# EAGLE board Skripsi Final Single (EAGLE 6.5.0)
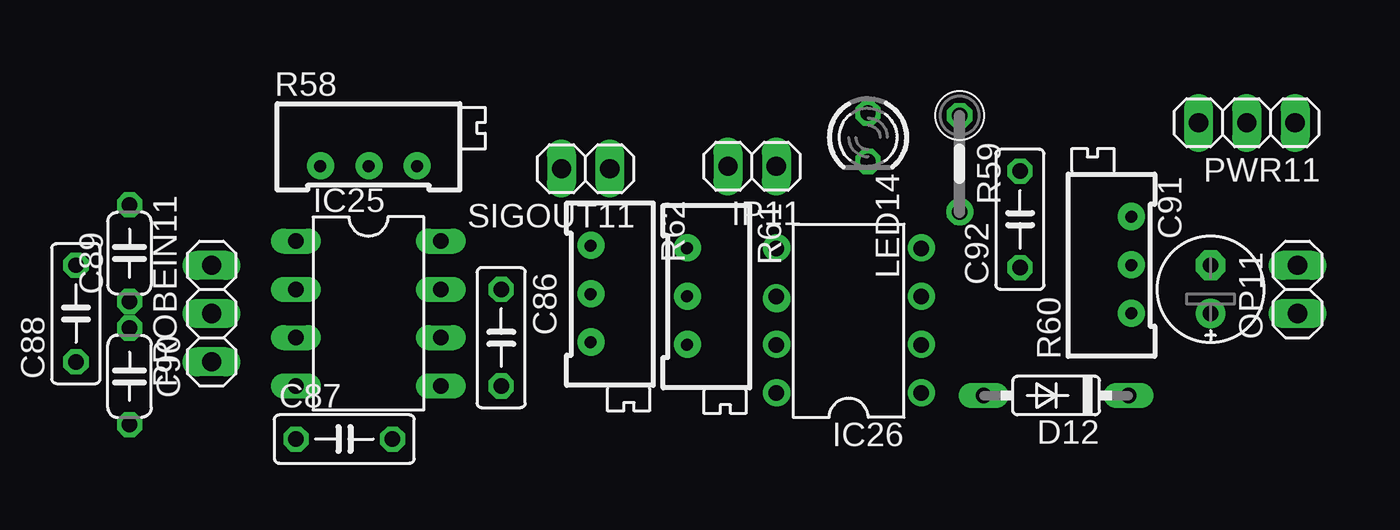
[diagram p0: board, top side]
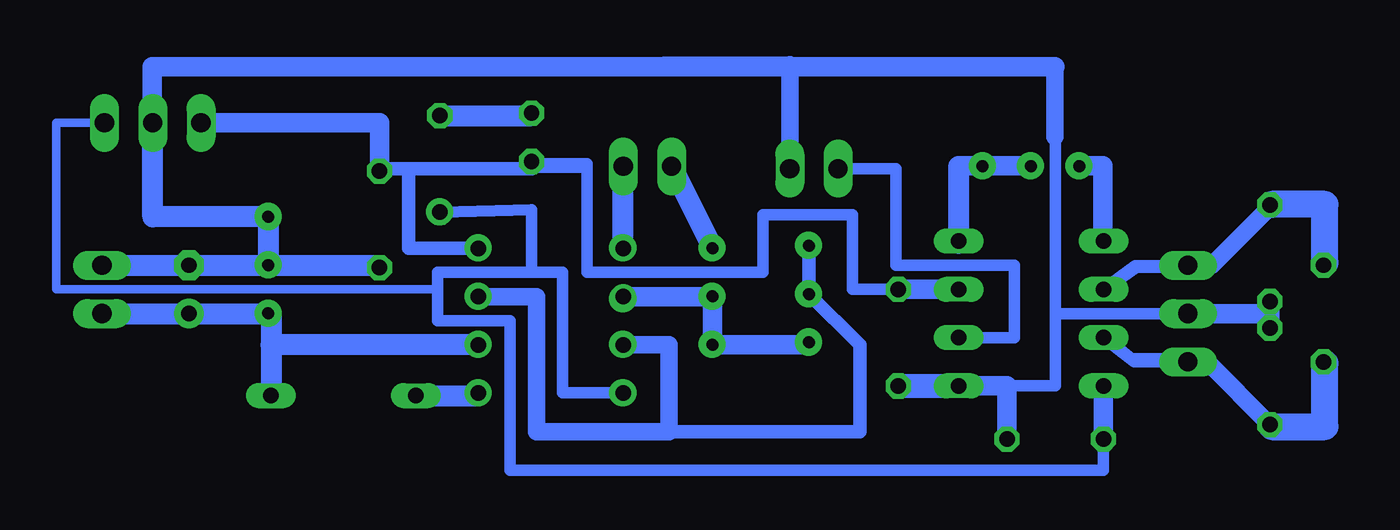
[diagram p1: board, bottom side, seen from below]

No outline drawn. Coordinates in mm, seen from the top.
Copper layers (1*16): Top 0.035mm / dielectric 1.5mm / Bottom 0.035mm
Design rules "default": minimum track width 10mil, minimum drill 24mil, track to track 8mil, track to pad 8mil, pad to pad 8mil, via to via 8mil, smd to smd 8mil, copper to edge 40mil, drill to drill 8mil, minimum pad ring 10mil, minimum via ring 8mil, stop-mask expansion 4mil, vias tented up to drill 0mil, thermal gap 10mil

## Footprints (pad centres in the part's own frame; a part is rotated, then mirrored left to right if it is on the bottom)
C050-025X075 = drill 0.813 octagon: 1 -2.54,0; 2 2.54,0
C050-024X044 = drill 0.813 octagon: 1 -2.54,0; 2 2.54,0
E2,5-6E = drill 0.813 pad 1.575: + -1.27,0 | drill 0.813 pad 1.575 octagon: - 1.27,0
DO35-7 = drill 0.813 long: A 3.81,0; C -3.81,0
DIL08 = drill 0.813 long: 1 -3.81,-3.81; 2 -1.27,-3.81; 3 1.27,-3.81; 4 3.81,-3.81; 5 3.81,3.81; 6 1.27,3.81; 7 -1.27,3.81; 8 -3.81,3.81
DIL08' = drill 0.813 pad 1.27: 1 -3.81,-3.81; 2 -1.27,-3.81; 3 1.27,-3.81; 4 3.81,-3.81; 5 3.81,3.81; 6 1.27,3.81; 7 -1.27,3.81; 8 -3.81,3.81
1X02 = drill 1.016 long: 1 -1.27,0; 2 1.27,0
LED3MM = drill 0.813 octagon: A -1.27,0; K 1.27,0
1X03 = drill 1.016 long: 1 -2.54,0; 2 0,0; 3 2.54,0
RTRIM64X = drill 0.61: 1 1.27,-2.54; 2 1.27,0; 3 1.27,2.54
0207/5V = drill 0.813 octagon: 1 -2.54,0; 2 2.54,0

## Placement (x,y rotation side)
C86  100n  [C050-025X075]  26.26,11.53 270 top
C87  100n  [C050-025X075]  18.01,6.2 0 top
C88  10n  [C050-025X075]  3.89,12.8 90 top
C89  1n  [C050-024X044]  6.71,15.98 90 top
C90  1n  [C050-024X044]  6.71,9.5 270 top
C91  [E2,5-6E]  63.6,14.07 90 top
C92  [C050-025X075]  53.57,17.75 90 top
D12  1N4148DO35-7  [DO35-7]  55.47,8.48 180 top
IC25  AD797N  [DIL08]  19.28,12.8 270 top
IC26  TL082P  [DIL08']  44.55,12.42 90 top
IP11  [1X02]  39.47,20.55 180 top
LED14  [LED3MM]  45.57,22.07 270 top
OP11  [1X02]  68.17,14.07 90 top
PROBEIN11  [1X03]  11.02,12.8 90 top
PWR11  [1X03]  65.51,22.83 180 top
R58  200R  [RTRIM64X]  19.28,21.82 270 top
R59  75k  [0207/5V]  50.39,20.68 270 top
R60  [RTRIM64X]  58.14,15.34 0 top
R61  [RTRIM64X]  37.31,13.69 180 top
R62  [RTRIM64X]  32.23,13.82 180 top
SIGOUT11  [1X02]  30.71,20.42 180 top

## Library data of the parts
C86-C92 R58-R62 = rcl
D12 = diode
IC25 = analog-devices; MF: ALTERA CORPORATION; MPN: AD797ANZ; OC_FARNELL: 9603778; OC_NEWARK: 59K6088
IC26 = linear
IP11 OP11 PROBEIN11 PWR11 SIGOUT11 = pinhead
LED14 = led

## Nets
N$177: IC25.1 R58.1
N$178: C88.1 C90.2 IC25.3 PROBEIN11.1
N$179: C88.2 C89.2 IC25.2 PROBEIN11.3
N$180: LED14.A R59.1
N$181: D12.A IC26.1
N$182: C86.1 C92.2 IC25.7 IC26.4 LED14.K PWR11.3
N$183: C87.1 IC25.4 IC26.8 PWR11.1 R59.2
N$184: C86.2 C87.2 C89.1 C90.1 C91.- C92.1 IC25.5 OP11.2 PROBEIN11.2 PWR11.2 R60.2 R60.3 SIGOUT11.1
N$185: C91.+ D12.C IC26.2 OP11.1 R60.1
N$186: IC25.6 SIGOUT11.2
N$187: IC26.3 IC26.7 R62.1 R62.2
N$188: IC26.6 R61.2 R61.3 R62.3
N$189: IP11.2 R61.1
N$190: IC26.5 IP11.1
N$191: IC25.8 R58.2 R58.3

## Tracks (layer width: path | path; a pad name or v marks a point on that pad's centre or on a via)
N$177
  Bottom 0.914: R58.1 15.47,20.55 IC25.1
N$178
  Bottom 0.457: 3.66,10.26 C88.1 | PROBEIN11.1 11.15,10.26
  Bottom 0.61: IC25.3 13.84,10.26 11.15,10.26
  Bottom 0.914: PROBEIN11.1 10.01,10.26 C90.2 3.66,6.96 3.66,10.26
N$179
  Bottom 0.457: 3.91,15.34 C88.2 | 11.15,15.34 PROBEIN11.3 9.5,15.34 6.71,18.14 6.71,18.39 C89.2
  Bottom 0.61: IC25.2 13.79,15.32 11.15,15.34
  Bottom 0.914: 3.91,15.34 3.91,18.39 6.71,18.39 | 6.71,18.39 6.71,18.64 | 11.02,15.21 PROBEIN11.3 9.75,15.34 6.71,18.39
N$180
  Bottom 0.457: 45.7,23.22 R59.1 | 45.7,23.22 45.44,23.22 | LED14.A 45.7,23.22
  Bottom 1.092: R59.1 45.57,23.22 LED14.A
N$181
  Bottom 0.457: D12.A 48.49,8.48 IC26.1
  Bottom 1.092: D12.A 48.36,8.48 IC26.1
N$182
  Bottom 0.457: 52.05,20.42 45.7,20.42 | IC26.4 48.74,16.36 52.05,16.36 52.05,20.3 | 33.38,14.96 33.38,14.94 42.65,14.94 42.65,20.42 45.57,20.42 45.7,20.42 | 45.7,20.42 LED14.K | 53.82,22.84 53.82,20.42 C92.2
  Bottom 0.61: C86.1 28.68,14.07 28.68,18.01 33.38,18.01 33.38,14.96 42.65,14.96 42.65,20.42 42.65,20.68 45.57,20.68
  Bottom 0.711: 48.23,16.23 52.05,16.23 52.05,20.3 52.05,20.42 | 52.05,20.42 53.57,20.42 C92.2 | 52.05,20.42 45.57,20.42 45.57,20.68 LED14.K
  Bottom 1.016: PWR11.3 53.82,22.84 53.57,22.84 C92.2 | C86.1 IC25.7
N$183
  Bottom 0.457: IC26.8 43.87,8.61 43.87,14.96 45.57,14.96 | PWR11.1 70.59,22.84 70.59,14.07 50.52,14.07 | C87.1 15.47,7.72
  Bottom 0.61: R59.2 45.57,18.26 45.57,14.96 50.52,14.96 50.52,14.07 50.52,12.42 46.71,12.42 46.71,4.55 15.47,4.55 15.47,6.07 C87.1 IC25.4
  Bottom 0.711: IC25.4 15.47,7.72
  Bottom 1.016: 15.47,6.07 IC25.4
N$184
  Bottom 0.457: OP11.2 C91.- R60.2 | 53.57,15.34 C92.1 | 6.71,13.31 C89.1 6.96,12.8 PROBEIN11.2 | IC25.5 C86.2
  Bottom 0.584: IC25.5 23.09,8.87
  Bottom 0.61: 20.55,8.99 18.01,8.99 18.01,12.8 | 18.01,12.8 18.01,25.76 31.98,25.88 | 18.01,12.8 PROBEIN11.2
  Bottom 0.914: SIGOUT11.1 31.98,25.88 65.51,25.76 PWR11.2
  Bottom 1.016: PROBEIN11.2 6.71,12.8 C90.1 C89.1 | C87.2 20.55,8.99 22.96,8.99 IC25.5
  Bottom 1.092: OP11.2 R60.2 | R60.2 53.57,15.34 | R60.2 R60.3 65.51,17.88 PWR11.2
  Bottom 1.27: C86.2 22.96,8.99
N$185
  Bottom 0.457: 59.41,11.02 R60.1 C91.+ OP11.1 | 59.41,11.02 59.41,8.48 D12.C | 59.41,11.02 48.49,11.02 IC26.2
  Bottom 1.092: 68.3,12.8 R60.1 59.28,12.8 59.28,11.15 | 59.28,11.15 D12.C | IC26.2 59.28,11.15
N$186
  Bottom 0.457: SIGOUT11.2 26.39,20.42
  Bottom 0.61: 29.57,20.42 26.39,20.42 26.39,15.34 20.17,15.34 20.17,11.53 IC25.6
N$187
  Bottom 0.457: 38.33,11.15 40.62,11.28 IC26.7
  Bottom 0.711: 38.33,6.58 28.3,6.58 28.3,11.15 R62.2 R62.1
  Bottom 0.914: IC26.3 45.31,13.69 45.31,6.58 38.33,6.58 38.33,11.15 IC26.7
N$188
  Bottom 0.457: 36.04,11.28 36.04,13.56 | 36.04,11.28 R62.3 | 36.04,11.28 R61.3 | 36.04,13.56 40.62,13.56 IC26.6 | 36.04,13.56 R61.2
  Bottom 1.016: IC26.6 R61.2 R61.3 30.96,11.15 R62.3
N$189
  Bottom 1.092: IP11.2 R61.1
N$190
  Bottom 0.457: IC26.5 40.62,16.36 40.62,20.42 IP11.1
  Bottom 1.092: 40.62,16.23 IC26.5 40.74,20.68
N$191
  Bottom 0.457: 19.28,20.42 21.82,20.42 | IC25.8 23.09,20.42 21.82,20.42 | 21.82,20.42 R58.3
  Bottom 0.914: 23.09,20.55 R58.2 19.28,20.42
  Bottom 1.092: 23.09,16.48 23.09,20.55
S$1  (via drill 0.6 pad 1.42)
  Bottom 0.61: 40.64,8.64 v40.77,8.64 43.94,8.64 43.94,14.99 46.23,14.99
S$2
  Bottom 0.61: 11.18,10.41 13.97,10.41 15.49,11.68
S$3
  Bottom 0.61: 15.49,13.97 13.72,15.24 11.68,15.24
S$4
  Bottom 0.914: 18.03,22.1 18.03,25.78
  Bottom 1.016: 18.03,25.78 65.53,25.78 65.53,23.11
S$5  (via drill 0.6 pad 1.42)
  Bottom 1.016: v19.3,20.57 v21.84,20.57 23.11,20.57 23.11,18.29
S$6  (via drill 0.6 pad 1.42)
  Bottom 1.016: v16.76,20.57 15.49,20.57 15.49,16.51
S$7  (via drill 0.6 pad 1.42)
  other vias: 30.99,16.38
S$8
  Bottom 1.422: 6.6,6.86 3.81,6.86 3.81,10.16
S$9
  Bottom 1.422: 3.81,15.49 3.81,18.54 6.6,18.54
S$10  (via drill 0.6 pad 1.42)
  other vias: 30.99,13.84
S$11  (via drill 0.6 pad 1.42)
  other vias: 30.99,11.3
S$12  (via drill 0.6 pad 1.42)
  other vias: 36.07,11.18
S$13  (via drill 0.6 pad 1.42)
  other vias: 36.07,13.72
S$14  (via drill 0.6 pad 1.42)
  other vias: 36.07,16.26
S$15  (via drill 0.6 pad 1.42)
  other vias: 40.77,16.26
S$16  (via drill 0.6 pad 1.42)
  other vias: 40.77,13.59
S$17  (via drill 0.6 pad 1.42)
  other vias: 40.77,11.18
S$18  (via drill 0.6 pad 1.42)
  other vias: 48.39,8.64
S$19  (via drill 0.6 pad 1.42)
  other vias: 48.39,11.18
S$20  (via drill 0.6 pad 1.42)
  other vias: 48.39,13.72
S$21  (via drill 0.6 pad 1.42)
  other vias: 48.39,16.26
S$22  (via drill 0.6 pad 1.42)
  other vias: 50.42,18.16
S$23  (via drill 0.6 pad 1.42)
  other vias: 59.44,17.91
S$24  (via drill 0.6 pad 1.42)
  other vias: 59.44,15.37
S$25  (via drill 0.6 pad 1.42)
  other vias: 59.44,12.83